# Altium PCB Sitara_Project_Rev_A_PCB.PcbDoc (part 5 of 9)
Units mm, origin at the board's own origin, x right, y up, seen from the top; angles counter-clockwise.
Board outline 120 x 85 mm, 8 copper layers (L1 (Sig), L2 (GND), L3 (PWR), L4 (Sig), L5 (GND), L6 (Sig), L7 (GND), L8 (Sig)), stack 1.188 mm thick; 458 components, 357 nets, 1916 pads, 1164 vias.
Unrouted connection lines stored in the file: 516.
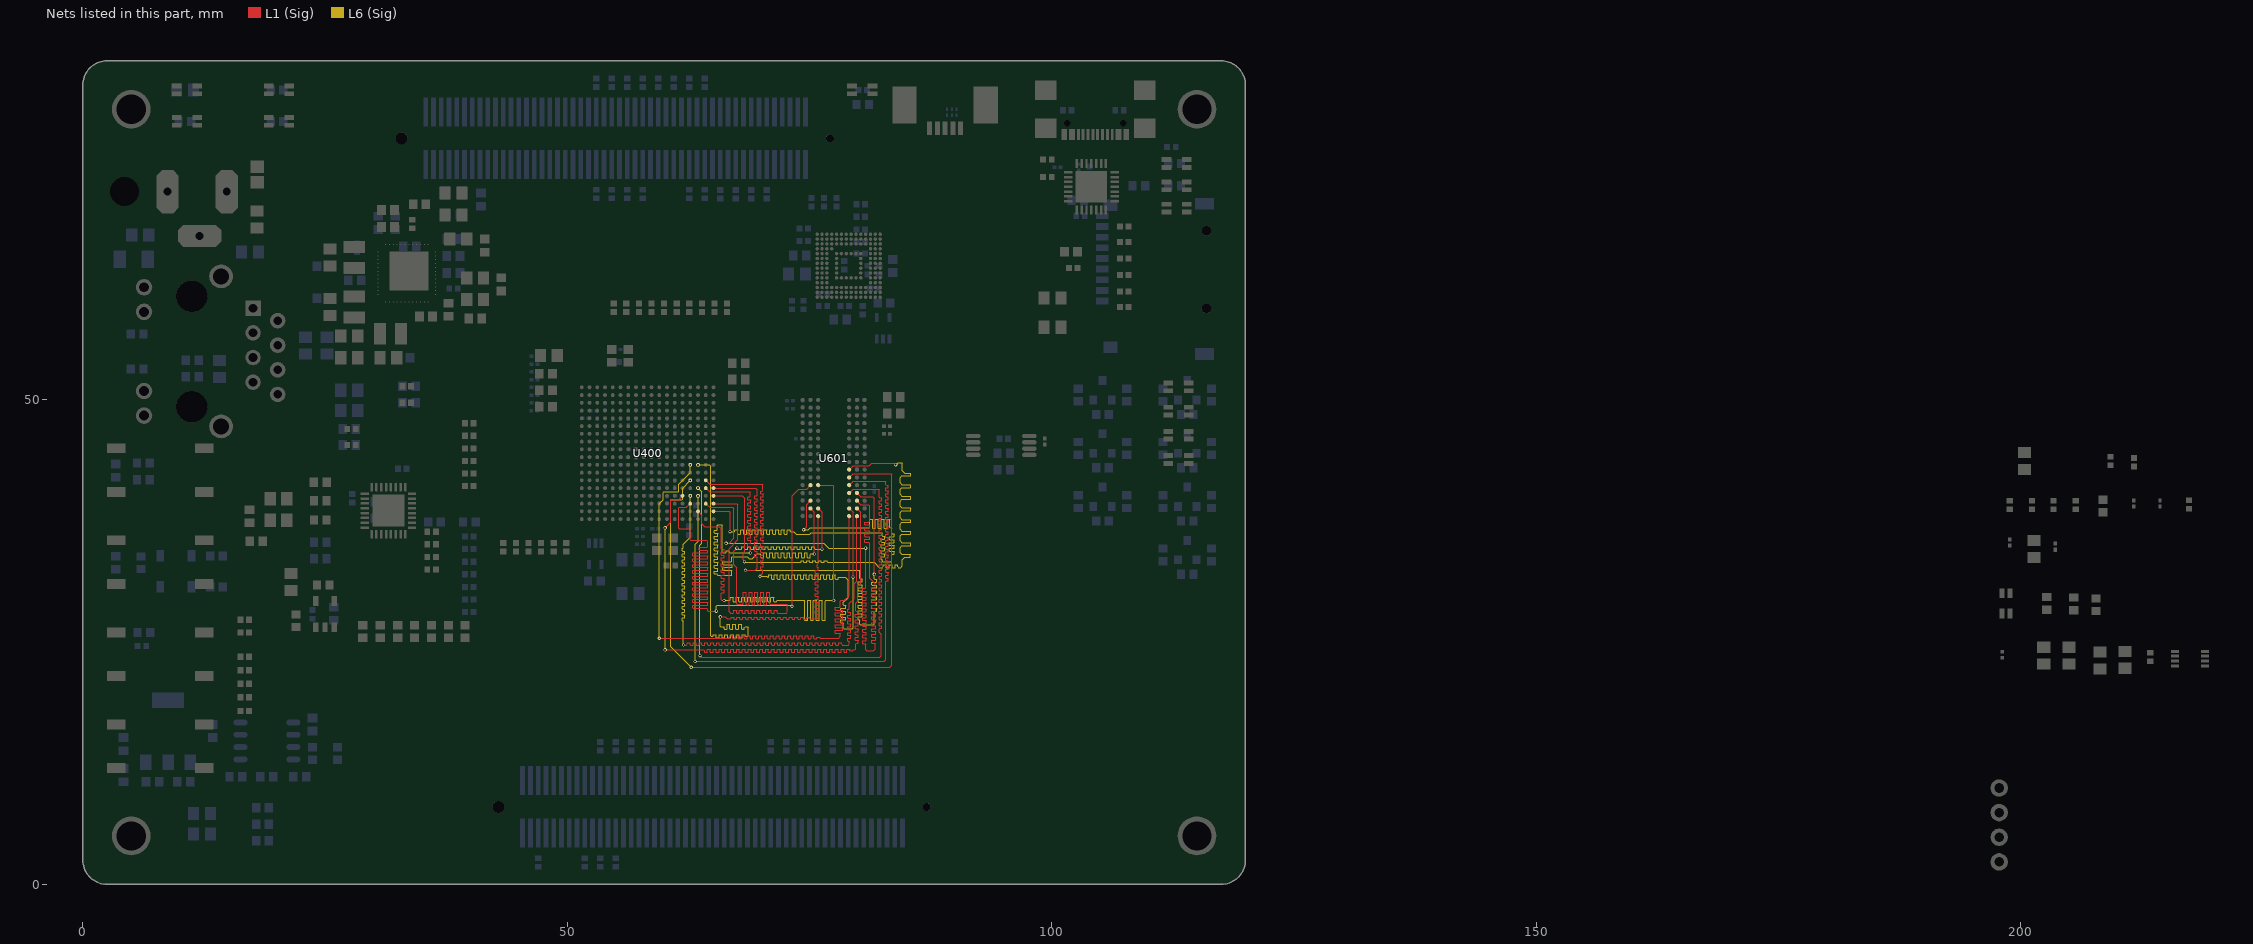
[diagram p8: the nets of this part, all layers, seen from the top]

## Via types
v1: diameter 0.35, hole 0.2, L1 (Sig) to L8 (Sig), tented both sides, 846 vias
v2: diameter 0.45, hole 0.3, L1 (Sig) to L8 (Sig), tented both sides, 302 vias
v3: diameter 0.45/0.45/0.45/0.45/0.45/0.45/0.45/0.45 (per signal layer), hole 0.3, L1 (Sig) to L8 (Sig), tented both sides, 16 vias

## Nets (pads, with @x,y where several pads share a name; then routed paths per layer and width w, separated by ;. In a path a pad name is that pad's centre, name@x,y a point inside that pad or via, vN(x,y) a via of type N, cw(c..) or ccw(c..) an arc to the next point about the centre after c; other vN are vias at no path point) (continued)
DDR_A4: U400.C2 U601.P8 | length 68.1
  L1 (Sig) w0.1: U400.C2@64.3,39.3 64.7,38.9 67.1,38.9 67.2,38.8 67.2,35.7 66.7,35.2 v1(66.4,35.2) ; U601.P8@79.9,39.6 80.3,39.2 81.141,39.2 81.2,39.141 81.2,37.803 81.2,37.453 81.141,37.395 80.719,37.395 80.689,37.365 80.689,37.125 80.719,37.095 81.177,37.095 81.207,37.065 81.207,36.825 81.177,36.795 80.719,36.795 80.689,36.765 80.689,36.525 80.719,36.495 81.177,36.495 81.207,36.465 81.207,36.225 81.177,36.195 80.719,36.195 80.689,36.165 80.689,35.925 80.719,35.895 81.177,35.895 81.207,35.865 81.207,35.625 81.177,35.595 80.719,35.595 80.689,35.565 80.689,35.325 80.719,35.295 81.141,35.295 81.2,35.236 81.2,34.962 81.2,31.614 81.8,31.014 81.8,30.664 81.741,30.605 81.443,30.605 81.413,30.575 81.413,30.335 81.443,30.305 81.805,30.305 81.835,30.275 81.835,30.035 81.805,30.005 81.443,30.005 81.413,29.975 81.413,29.735 81.443,29.705 81.805,29.705 81.835,29.675 81.835,29.435 81.805,29.405 81.443,29.405 81.413,29.375 81.413,29.135 81.443,29.105 81.805,29.105 81.835,29.075 81.835,28.835 81.805,28.805 81.443,28.805 81.413,28.775 81.413,28.535 81.443,28.505 81.805,28.505 81.835,28.475 81.835,28.235 81.805,28.205 81.443,28.205 81.413,28.175 81.413,27.935 81.443,27.905 81.805,27.905 81.835,27.875 81.835,27.635 81.805,27.605 81.443,27.605 81.413,27.575 81.413,27.335 81.443,27.305 81.805,27.305 81.835,27.275 81.835,27.035 81.805,27.005 81.443,27.005 81.413,26.975 81.413,26.735 81.443,26.705 81.805,26.705 81.835,26.675 81.835,26.435 81.805,26.405 81.443,26.405 81.413,26.375 81.413,26.135 81.443,26.105 81.805,26.105 81.835,26.075 81.835,25.835 81.805,25.805 81.443,25.805 81.413,25.775 81.413,25.535 81.443,25.505 81.805,25.505 81.835,25.475 81.835,25.235 81.805,25.205 81.443,25.205 81.413,25.175 81.413,24.935 81.443,24.905 81.741,24.905 81.8,24.847 81.8,24.471 81.8,24.286 81.786,24.286 81.6,24.1 80.9,24.1 80.8,24.2 80.8,24.73 80.8,24.78 80.741,24.838 80.521,24.838 80.491,24.868 80.491,25.108 80.521,25.138 80.835,25.138 80.865,25.168 80.865,25.408 80.835,25.438 80.521,25.438 80.491,25.468 80.491,25.708 80.521,25.738 80.835,25.738 80.865,25.768 80.865,26.008 80.835,26.038 80.521,26.038 80.491,26.068 80.491,26.308 80.521,26.338 80.835,26.338 80.865,26.368 80.865,26.608 80.835,26.638 80.521,26.638 80.491,26.668 80.491,26.908 80.521,26.938 80.835,26.938 80.865,26.968 80.865,27.208 80.835,27.238 80.521,27.238 80.491,27.268 80.491,27.508 80.521,27.538 80.835,27.538 80.865,27.568 80.865,27.808 80.835,27.838 80.521,27.838 80.491,27.868 80.491,28.108 80.521,28.138 80.835,28.138 80.865,28.168 80.865,28.408 80.835,28.438 80.521,28.438 80.491,28.468 80.491,28.708 80.521,28.738 80.835,28.738 80.865,28.768 80.865,29.008 80.835,29.038 80.521,29.038 80.491,29.068 80.491,29.308 80.521,29.338 80.835,29.338 80.865,29.368 80.865,29.608 80.835,29.638 80.521,29.638 80.491,29.668 80.491,29.908 80.521,29.938 80.835,29.938 80.865,29.968 80.865,30.208 80.835,30.238 80.521,30.238 80.491,30.268 80.491,30.508 80.521,30.538 80.741,30.538 80.8,30.597 80.8,30.9 v1(80.8,34.7)
  L6 (Sig) w0.1: v1(66.4,35.2) 76.5,35.2 77,34.7 v1(80.8,34.7)
DDR_A5: U400.B1 U601.P2 | length 59.4
  L1 (Sig) w0.1: U400.B1@65.1,38.5 66.7,38.5 66.8,38.4 v1(66.8,36.4) ; v1(74.4,36.6) 74.7,36.9 74.7,39.2 U601.P2@75.1,39.6
  L6 (Sig) w0.1: v1(66.8,36.4) 67.2,36.4 67.25,36.4 67.309,36.459 67.309,36.556 67.339,36.586 67.579,36.586 67.609,36.556 67.609,36.18 67.639,36.15 67.879,36.15 67.909,36.18 67.909,36.556 67.939,36.586 68.179,36.586 68.209,36.556 68.209,36.18 68.239,36.15 68.479,36.15 68.509,36.18 68.509,36.556 68.539,36.586 68.779,36.586 68.809,36.556 68.809,36.18 68.839,36.15 69.079,36.15 69.109,36.18 69.109,36.556 69.139,36.586 69.379,36.586 69.409,36.556 69.409,36.18 69.439,36.15 69.679,36.15 69.709,36.18 69.709,36.556 69.739,36.586 69.979,36.586 70.009,36.556 70.009,36.18 70.039,36.15 70.279,36.15 70.309,36.18 70.309,36.556 70.339,36.586 70.579,36.586 70.609,36.556 70.609,36.18 70.639,36.15 70.879,36.15 70.909,36.18 70.909,36.556 70.939,36.586 71.179,36.586 71.209,36.556 71.209,36.18 71.239,36.15 71.479,36.15 71.509,36.18 71.509,36.556 71.539,36.586 71.779,36.586 71.809,36.556 71.809,36.18 71.839,36.15 72.079,36.15 72.109,36.18 72.109,36.556 72.139,36.586 72.379,36.586 72.409,36.556 72.409,36.18 72.439,36.15 72.679,36.15 72.709,36.18 72.709,36.556 72.739,36.586 72.979,36.586 73.009,36.556 73.009,36.459 73.067,36.4 73.389,36.4 73.642,36.147 75.047,36.147 75.2,36.3 82.441,36.3 82.5,36.241 82.5,36.077 82.5,35.99 82.559,35.931 82.72,35.931 82.75,35.901 82.75,35.661 82.72,35.631 82.439,35.631 82.409,35.601 82.409,35.361 82.439,35.331 82.72,35.331 82.75,35.301 82.75,35.061 82.72,35.031 82.439,35.031 82.409,35.001 82.409,34.761 82.439,34.731 82.72,34.731 82.75,34.701 82.75,34.461 82.72,34.431 82.439,34.431 82.409,34.401 82.409,34.161 82.439,34.131 82.72,34.131 82.75,34.101 82.75,33.861 82.72,33.831 82.439,33.831 82.409,33.801 82.409,33.561 82.439,33.531 82.441,33.531 82.5,33.472 82.5,33.422 82.5,33.359 82.559,33.3 83.4,33.3 83.5,33.4 83.5,33.7 83.5,34.02 83.559,34.079 83.72,34.079 83.75,34.109 83.75,34.349 83.72,34.379 83.28,34.379 83.25,34.409 83.25,34.649 83.28,34.679 83.72,34.679 83.75,34.709 83.75,34.949 83.72,34.979 83.28,34.979 83.25,35.009 83.25,35.249 83.28,35.279 83.72,35.279 83.75,35.309 83.75,35.549 83.72,35.579 83.28,35.579 83.25,35.609 83.25,35.849 83.28,35.879 83.72,35.879 83.75,35.909 83.75,36.149 83.72,36.179 83.559,36.179 83.5,36.238 83.5,36.288 83.5,36.741 83.441,36.8 83.37,36.8 83.311,36.859 83.311,37.63 83.281,37.66 83.041,37.66 83.011,37.63 83.011,36.77 82.981,36.74 82.741,36.74 82.711,36.77 82.711,37.63 82.681,37.66 82.441,37.66 82.411,37.63 82.411,36.77 82.381,36.74 82.141,36.74 82.111,36.77 82.111,37.63 82.081,37.66 81.841,37.66 81.811,37.63 81.811,36.77 81.781,36.74 81.541,36.74 81.511,36.77 81.511,37.63 81.481,37.66 81.241,37.66 81.211,37.63 81.211,36.859 81.152,36.8 81.102,36.8 75.1,36.8 74.9,36.6 v1(74.4,36.6)
DDR_A6: U400.D5 U601.R8 | length 68.8
  L1 (Sig) w0.1: v1(60.1,24.2) 63.765,24.2 64.115,24.2 64.173,24.141 64.173,23.98 64.203,23.95 64.443,23.95 64.473,23.98 64.473,24.235 64.503,24.265 64.743,24.265 64.773,24.235 64.773,23.98 64.803,23.95 65.043,23.95 65.073,23.98 65.073,24.235 65.103,24.265 65.343,24.265 65.373,24.235 65.373,23.98 65.403,23.95 65.643,23.95 65.673,23.98 65.673,24.235 65.703,24.265 65.943,24.265 65.973,24.235 65.973,23.98 66.003,23.95 66.243,23.95 66.273,23.98 66.273,24.235 66.303,24.265 66.543,24.265 66.573,24.235 66.573,23.98 66.603,23.95 66.843,23.95 66.873,23.98 66.873,24.235 66.903,24.265 67.143,24.265 67.173,24.235 67.173,23.98 67.203,23.95 67.443,23.95 67.473,23.98 67.473,24.235 67.503,24.265 67.743,24.265 67.773,24.235 67.773,23.98 67.803,23.95 68.043,23.95 68.073,23.98 68.073,24.235 68.103,24.265 68.343,24.265 68.373,24.235 68.373,23.98 68.403,23.95 68.643,23.95 68.673,23.98 68.673,24.235 68.703,24.265 68.943,24.265 68.973,24.235 68.973,23.98 69.003,23.95 69.243,23.95 69.273,23.98 69.273,24.235 69.303,24.265 69.543,24.265 69.573,24.235 69.573,23.98 69.603,23.95 69.843,23.95 69.873,23.98 69.873,24.235 69.903,24.265 70.143,24.265 70.173,24.235 70.173,23.98 70.203,23.95 70.443,23.95 70.473,23.98 70.473,24.235 70.503,24.265 70.743,24.265 70.773,24.235 70.773,23.98 70.803,23.95 71.043,23.95 71.073,23.98 71.073,24.235 71.103,24.265 71.343,24.265 71.373,24.235 71.373,23.98 71.403,23.95 71.643,23.95 71.673,23.98 71.673,24.235 71.703,24.265 71.943,24.265 71.973,24.235 71.973,23.98 72.003,23.95 72.243,23.95 72.273,23.98 72.273,24.235 72.303,24.265 72.543,24.265 72.573,24.235 72.573,23.98 72.603,23.95 72.843,23.95 72.873,23.98 72.873,24.235 72.903,24.265 73.143,24.265 73.173,24.235 73.173,23.98 73.203,23.95 73.443,23.95 73.473,23.98 73.473,24.235 73.503,24.265 73.743,24.265 73.773,24.235 73.773,23.98 73.803,23.95 74.043,23.95 74.073,23.98 74.073,24.235 74.103,24.265 74.343,24.265 74.373,24.235 74.373,23.98 74.403,23.95 74.643,23.95 74.673,23.98 74.673,24.235 74.703,24.265 74.943,24.265 74.973,24.235 74.973,23.98 75.003,23.95 75.243,23.95 75.273,23.98 75.273,24.235 75.303,24.265 75.543,24.265 75.573,24.235 75.573,23.98 75.603,23.95 75.843,23.95 75.873,23.98 75.873,24.235 75.903,24.265 76.143,24.265 76.173,24.235 76.173,23.98 76.203,23.95 76.443,23.95 76.473,23.98 76.473,24.235 76.503,24.265 76.743,24.265 76.773,24.235 76.773,23.98 76.803,23.95 77.043,23.95 77.073,23.98 77.073,24.235 77.103,24.265 77.343,24.265 77.373,24.235 77.373,23.98 77.403,23.95 77.643,23.95 77.673,23.98 77.673,24.235 77.703,24.265 77.943,24.265 77.973,24.235 77.973,23.98 78.003,23.95 78.243,23.95 78.273,23.98 78.273,24.235 78.303,24.265 78.543,24.265 78.573,24.235 78.573,23.98 78.603,23.95 78.843,23.95 78.873,23.98 78.873,24.235 78.903,24.265 79.143,24.265 79.173,24.235 79.173,24.132 79.203,24.102 79.443,24.102 79.473,24.132 79.473,24.141 79.532,24.2 79.7,24.2 79.754,24.254 79.8,24.3 79.8,24.475 79.8,24.825 79.859,24.884 80.02,24.884 80.05,24.914 80.05,25.154 80.02,25.184 79.777,25.184 79.747,25.214 79.747,25.454 79.777,25.484 80.02,25.484 80.05,25.514 80.05,25.754 80.02,25.784 79.777,25.784 79.747,25.814 79.747,26.054 79.777,26.084 80.02,26.084 80.05,26.114 80.05,26.354 80.02,26.384 79.777,26.384 79.747,26.414 79.747,26.654 79.777,26.684 80.02,26.684 80.05,26.714 80.05,26.954 80.02,26.984 79.777,26.984 79.747,27.014 79.747,27.254 79.777,27.284 80.02,27.284 80.05,27.314 80.05,27.554 80.02,27.584 79.777,27.584 79.747,27.614 79.747,27.854 79.777,27.884 80.02,27.884 80.05,27.914 80.05,28.154 80.02,28.184 79.859,28.184 79.8,28.242 79.8,28.88 79.8,29 80,29.2 80,30.8 80.3,31.1 80.3,38.4 U601.R8@79.9,38.8 ; v1(60.1,36.8) 60.112,36.8 60.7,37.388 60.7,39.641 60.759,39.7 61.5,39.7 U400.D5@61.9,40.1
  L6 (Sig) w0.1: v1(60.1,24.2) v1(60.1,36.8)
DDR_A7: U400.E2 U601.R2 | length 62
  L1 (Sig) w0.1: U400.E2@64.3,40.9 64.7,40.5 68.841,40.5 68.9,40.441 68.9,40.398 68.9,40.048 68.841,39.989 68.68,39.989 68.65,39.959 68.65,39.719 68.68,39.689 68.935,39.689 68.965,39.659 68.965,39.419 68.935,39.389 68.68,39.389 68.65,39.359 68.65,39.119 68.68,39.089 68.935,39.089 68.965,39.059 68.965,38.819 68.935,38.789 68.68,38.789 68.65,38.759 68.65,38.519 68.68,38.489 68.935,38.489 68.965,38.459 68.965,38.219 68.935,38.189 68.68,38.189 68.65,38.159 68.65,37.919 68.68,37.889 68.935,37.889 68.965,37.859 68.965,37.619 68.935,37.589 68.68,37.589 68.65,37.559 68.65,37.319 68.68,37.289 68.935,37.289 68.965,37.259 68.965,37.019 68.935,36.989 68.68,36.989 68.65,36.959 68.65,36.719 68.68,36.689 68.935,36.689 68.965,36.659 68.965,36.419 68.935,36.389 68.68,36.389 68.65,36.359 68.65,36.119 68.68,36.089 68.935,36.089 68.965,36.059 68.965,35.819 68.935,35.789 68.68,35.789 68.65,35.759 68.65,35.519 68.68,35.489 68.935,35.489 68.965,35.459 68.965,35.219 68.935,35.189 68.68,35.189 68.65,35.159 68.65,34.919 68.68,34.889 68.841,34.889 68.9,34.831 68.9,34.4 v1(68.9,34.2) ; U601.R2@75.1,38.8 75.5,38.4 v1(75.5,34.1)
  L6 (Sig) w0.1: v1(68.9,34.2) 67,34.2 66.793,34.2 66.734,34.259 66.734,34.435 66.719,34.45 66.449,34.45 66.434,34.435 66.434,34.259 66.376,34.2 66.326,34.2 66.059,34.2 66,34.259 66,37.041 65.941,37.1 65.559,37.1 65.513,37.054 65.5,37.041 65.5,36.593 65.441,36.535 65.223,36.535 65.193,36.505 65.193,36.265 65.223,36.235 65.529,36.235 65.559,36.205 65.559,35.965 65.529,35.935 65.223,35.935 65.193,35.905 65.193,35.665 65.223,35.635 65.529,35.635 65.559,35.605 65.559,35.365 65.529,35.335 65.223,35.335 65.193,35.305 65.193,35.065 65.223,35.035 65.529,35.035 65.559,35.005 65.559,34.765 65.529,34.735 65.223,34.735 65.193,34.705 65.193,34.465 65.223,34.435 65.529,34.435 65.559,34.405 65.559,34.165 65.529,34.135 65.223,34.135 65.193,34.105 65.193,33.865 65.223,33.835 65.529,33.835 65.559,33.805 65.559,33.565 65.529,33.535 65.223,33.535 65.193,33.505 65.193,33.265 65.223,33.235 65.529,33.235 65.559,33.205 65.559,32.965 65.529,32.935 65.223,32.935 65.193,32.905 65.193,32.665 65.223,32.635 65.529,32.635 65.559,32.605 65.559,32.365 65.529,32.335 65.223,32.335 65.193,32.305 65.193,32.065 65.223,32.035 65.441,32.035 65.5,31.976 65.5,31.959 65.532,31.926 65.559,31.9 66.941,31.9 66.959,31.918 67,31.959 67,32.344 66.941,32.403 66.093,32.403 66.063,32.433 66.063,32.673 66.093,32.703 67.028,32.703 67.058,32.733 67.058,32.973 67.028,33.003 66.093,33.003 66.063,33.033 66.063,33.273 66.093,33.303 66.941,33.303 67,33.361 67,33.741 67.053,33.794 67.059,33.8 68.6,33.8 68.8,33.6 69.1,33.6 69.6,34.1 69.7,34.1 69.933,34.1 69.991,34.041 69.991,33.747 70.021,33.717 70.261,33.717 70.291,33.747 70.291,34.212 70.321,34.242 70.561,34.242 70.591,34.212 70.591,33.747 70.621,33.717 70.861,33.717 70.891,33.747 70.891,34.212 70.921,34.242 71.161,34.242 71.191,34.212 71.191,33.747 71.221,33.717 71.461,33.717 71.491,33.747 71.491,34.212 71.521,34.242 71.761,34.242 71.791,34.212 71.791,33.747 71.821,33.717 72.061,33.717 72.091,33.747 72.091,34.212 72.121,34.242 72.361,34.242 72.391,34.212 72.391,33.747 72.421,33.717 72.661,33.717 72.691,33.747 72.691,34.212 72.721,34.242 72.961,34.242 72.991,34.212 72.991,33.747 73.021,33.717 73.261,33.717 73.291,33.747 73.291,34.212 73.321,34.242 73.561,34.242 73.591,34.212 73.591,33.747 73.621,33.717 73.861,33.717 73.891,33.747 73.891,34.212 73.921,34.242 74.161,34.242 74.191,34.212 74.191,33.747 74.221,33.717 74.461,33.717 74.491,33.747 74.491,34.212 74.521,34.242 74.761,34.242 74.791,34.212 74.791,33.747 74.821,33.717 75.061,33.717 75.091,33.747 75.091,34.041 75.15,34.1 75.2,34.1 v1(75.5,34.1)
DDR_A8: U400.D4 U601.T8 | length 66.8
  L1 (Sig) w0.1: v1(62,24.7) 62.3,24.7 62.35,24.7 62.409,24.759 62.409,24.92 62.439,24.95 62.679,24.95 62.709,24.92 62.709,24.723 62.739,24.693 62.979,24.693 63.009,24.723 63.009,24.92 63.039,24.95 63.279,24.95 63.309,24.92 63.309,24.723 63.339,24.693 63.579,24.693 63.609,24.723 63.609,24.92 63.639,24.95 63.879,24.95 63.909,24.92 63.909,24.723 63.939,24.693 64.179,24.693 64.209,24.723 64.209,24.92 64.239,24.95 64.479,24.95 64.509,24.92 64.509,24.723 64.539,24.693 64.779,24.693 64.809,24.723 64.809,24.92 64.839,24.95 65.079,24.95 65.109,24.92 65.109,24.723 65.139,24.693 65.379,24.693 65.409,24.723 65.409,24.92 65.439,24.95 65.679,24.95 65.709,24.92 65.709,24.723 65.739,24.693 65.979,24.693 66.009,24.723 66.009,24.92 66.039,24.95 66.279,24.95 66.309,24.92 66.309,24.723 66.339,24.693 66.579,24.693 66.609,24.723 66.609,24.92 66.639,24.95 66.879,24.95 66.909,24.92 66.909,24.723 66.939,24.693 67.179,24.693 67.209,24.723 67.209,24.92 67.239,24.95 67.479,24.95 67.509,24.92 67.509,24.723 67.539,24.693 67.779,24.693 67.809,24.723 67.809,24.92 67.839,24.95 68.079,24.95 68.109,24.92 68.109,24.723 68.139,24.693 68.379,24.693 68.409,24.723 68.409,24.92 68.439,24.95 68.679,24.95 68.709,24.92 68.709,24.723 68.739,24.693 68.979,24.693 69.009,24.723 69.009,24.92 69.039,24.95 69.279,24.95 69.309,24.92 69.309,24.723 69.339,24.693 69.579,24.693 69.609,24.723 69.609,24.92 69.639,24.95 69.879,24.95 69.909,24.92 69.909,24.723 69.939,24.693 70.179,24.693 70.209,24.723 70.209,24.92 70.239,24.95 70.479,24.95 70.509,24.92 70.509,24.723 70.539,24.693 70.779,24.693 70.809,24.723 70.809,24.92 70.839,24.95 71.079,24.95 71.109,24.92 71.109,24.723 71.139,24.693 71.379,24.693 71.409,24.723 71.409,24.92 71.439,24.95 71.679,24.95 71.709,24.92 71.709,24.723 71.739,24.693 71.979,24.693 72.009,24.723 72.009,24.92 72.039,24.95 72.279,24.95 72.309,24.92 72.309,24.723 72.339,24.693 72.579,24.693 72.609,24.723 72.609,24.92 72.639,24.95 72.879,24.95 72.909,24.92 72.909,24.723 72.939,24.693 73.179,24.693 73.209,24.723 73.209,24.92 73.239,24.95 73.479,24.95 73.509,24.92 73.509,24.723 73.539,24.693 73.779,24.693 73.809,24.723 73.809,24.92 73.839,24.95 74.079,24.95 74.109,24.92 74.109,24.723 74.139,24.693 74.379,24.693 74.409,24.723 74.409,24.92 74.439,24.95 74.679,24.95 74.709,24.92 74.709,24.723 74.739,24.693 74.979,24.693 75.009,24.723 75.009,24.92 75.039,24.95 75.279,24.95 75.309,24.92 75.309,24.723 75.339,24.693 75.579,24.693 75.609,24.723 75.609,24.92 75.639,24.95 75.879,24.95 75.909,24.92 75.909,24.723 75.939,24.693 76.179,24.693 76.209,24.723 76.209,24.92 76.239,24.95 76.479,24.95 76.509,24.92 76.509,24.723 76.539,24.693 76.779,24.693 76.809,24.723 76.809,24.92 76.839,24.95 77.079,24.95 77.109,24.92 77.109,24.723 77.139,24.693 77.379,24.693 77.409,24.723 77.409,24.92 77.439,24.95 77.679,24.95 77.709,24.92 77.709,24.723 77.739,24.693 77.979,24.693 78.009,24.723 78.009,24.92 78.039,24.95 78.279,24.95 78.309,24.92 78.309,24.759 78.367,24.7 78.818,24.7 78.868,24.7 79.041,24.7 79.1,24.759 79.1,24.979 79.1,25.029 79.041,25.088 78.979,25.088 78.949,25.118 78.949,25.358 78.979,25.388 79.225,25.388 79.255,25.418 79.255,25.658 79.225,25.688 78.979,25.688 78.949,25.718 78.949,25.958 78.979,25.988 79.225,25.988 79.255,26.018 79.255,26.258 79.225,26.288 78.979,26.288 78.949,26.318 78.949,26.558 78.979,26.588 79.225,26.588 79.255,26.618 79.255,26.858 79.225,26.888 78.979,26.888 78.949,26.918 78.949,27.158 78.979,27.188 79.225,27.188 79.255,27.218 79.255,27.458 79.225,27.488 78.979,27.488 78.949,27.518 78.949,27.758 78.979,27.788 79.225,27.788 79.255,27.818 79.255,28.058 79.225,28.088 78.979,28.088 78.949,28.118 78.949,28.358 78.979,28.388 79.041,28.388 79.1,28.446 79.1,28.775 79.1,29 79.6,29.5 79.6,31 79.9,31.3 U601.T8@79.9,38
  L6 (Sig) w0.1: v1(62,24.7) 62,27.091 62,27.141 61.941,27.2 61.899,27.2 61.869,27.23 61.869,27.47 61.899,27.5 62.101,27.5 62.131,27.53 62.131,27.77 62.101,27.8 61.899,27.8 61.869,27.83 61.869,28.07 61.899,28.1 62.101,28.1 62.131,28.13 62.131,28.37 62.101,28.4 61.899,28.4 61.869,28.43 61.869,28.67 61.899,28.7 62.101,28.7 62.131,28.73 62.131,28.97 62.101,29 61.899,29 61.869,29.03 61.869,29.27 61.899,29.3 62.101,29.3 62.131,29.33 62.131,29.57 62.101,29.6 61.899,29.6 61.869,29.63 61.869,29.87 61.899,29.9 62.101,29.9 62.131,29.93 62.131,30.17 62.101,30.2 61.899,30.2 61.869,30.23 61.869,30.47 61.899,30.5 62.101,30.5 62.131,30.53 62.131,30.77 62.101,30.8 61.899,30.8 61.869,30.83 61.869,31.07 61.899,31.1 62.101,31.1 62.131,31.13 62.131,31.37 62.101,31.4 61.899,31.4 61.869,31.43 61.869,31.67 61.899,31.7 62.101,31.7 62.131,31.73 62.131,31.97 62.101,32 61.899,32 61.869,32.03 61.869,32.27 61.899,32.3 62.101,32.3 62.131,32.33 62.131,32.57 62.101,32.6 61.899,32.6 61.869,32.63 61.869,32.87 61.899,32.9 62.101,32.9 62.131,32.93 62.131,33.17 62.101,33.2 61.899,33.2 61.869,33.23 61.869,33.47 61.899,33.5 62.101,33.5 62.131,33.53 62.131,33.77 62.101,33.8 61.899,33.8 61.869,33.83 61.869,34.07 61.899,34.1 62.101,34.1 62.131,34.13 62.131,34.37 62.101,34.4 61.899,34.4 61.869,34.43 61.869,34.67 61.899,34.7 61.941,34.7 62,34.759 62,34.92 62,35.1 62.7,35.8 v1(62.7,40.1)
DDR_A9: U400.C1 U601.R3 | length 68
  L1 (Sig) w0.1: U400.C1@65.1,39.3 67.5,39.3 67.6,39.2 67.6,35.554 66.7,34.654 66.7,28.159 66.859,28 67.012,28 67.12,28 67.179,28.059 67.179,28.258 67.209,28.288 67.449,28.288 67.479,28.258 67.479,28.03 67.509,28 67.749,28 67.779,28.03 67.779,28.258 67.809,28.288 68.049,28.288 68.079,28.258 68.079,28.03 68.109,28 68.349,28 68.379,28.03 68.379,28.258 68.409,28.288 68.649,28.288 68.679,28.258 68.679,28.03 68.709,28 68.949,28 68.979,28.03 68.979,28.258 69.009,28.288 69.249,28.288 69.279,28.258 69.279,28.03 69.309,28 69.549,28 69.579,28.03 69.579,28.258 69.609,28.288 69.849,28.288 69.879,28.258 69.879,28.03 69.909,28 70.149,28 70.179,28.03 70.179,28.258 70.209,28.288 70.449,28.288 70.479,28.258 70.479,28.03 70.509,28 70.749,28 70.779,28.03 70.779,28.258 70.809,28.288 71.049,28.288 71.079,28.258 71.079,28.03 71.109,28 71.349,28 71.379,28.03 71.379,28.258 71.409,28.288 71.649,28.288 71.679,28.258 71.679,28.059 71.737,28 72.087,28 72.641,28 72.7,28.059 72.7,28.841 72.641,28.9 71.286,28.9 70.936,28.9 70.878,28.959 70.878,30.13 70.848,30.16 70.608,30.16 70.578,30.13 70.578,28.91 70.548,28.88 70.308,28.88 70.278,28.91 70.278,30.13 70.248,30.16 70.008,30.16 69.978,30.13 69.978,28.91 69.948,28.88 69.708,28.88 69.678,28.91 69.678,30.13 69.648,30.16 69.408,30.16 69.378,30.13 69.378,28.91 69.348,28.88 69.108,28.88 69.078,28.91 69.078,30.13 69.048,30.16 68.808,30.16 68.778,30.13 68.778,28.91 68.748,28.88 68.508,28.88 68.478,28.91 68.478,30.13 68.448,30.16 68.208,30.16 68.178,30.13 68.178,28.959 68.119,28.9 67.736,28.9 67.559,28.9 67.5,28.959 67.5,32.7 67.2,33 67.2,34.4 v1(67.5,34.7) ; U601.R3@75.9,38.8 76.3,38.4 v1(76.3,34.6)
  L6 (Sig) w0.1: v1(67.5,34.7) 67.568,34.7 67.668,34.6 67.925,34.6 67.975,34.6 68.034,34.659 68.034,34.82 68.064,34.85 68.304,34.85 68.334,34.82 68.334,34.596 68.364,34.566 68.604,34.566 68.634,34.596 68.634,34.82 68.664,34.85 68.904,34.85 68.934,34.82 68.934,34.596 68.964,34.566 69.204,34.566 69.234,34.596 69.234,34.82 69.264,34.85 69.504,34.85 69.534,34.82 69.534,34.596 69.564,34.566 69.804,34.566 69.834,34.596 69.834,34.82 69.864,34.85 70.104,34.85 70.134,34.82 70.134,34.596 70.164,34.566 70.404,34.566 70.434,34.596 70.434,34.82 70.464,34.85 70.704,34.85 70.734,34.82 70.734,34.596 70.764,34.566 71.004,34.566 71.034,34.596 71.034,34.82 71.064,34.85 71.304,34.85 71.334,34.82 71.334,34.596 71.364,34.566 71.604,34.566 71.634,34.596 71.634,34.82 71.664,34.85 71.904,34.85 71.934,34.82 71.934,34.596 71.964,34.566 72.204,34.566 72.234,34.596 72.234,34.82 72.264,34.85 72.504,34.85 72.534,34.82 72.534,34.596 72.564,34.566 72.804,34.566 72.834,34.596 72.834,34.82 72.864,34.85 73.104,34.85 73.134,34.82 73.134,34.596 73.164,34.566 73.404,34.566 73.434,34.596 73.434,34.82 73.464,34.85 73.704,34.85 73.734,34.82 73.734,34.596 73.764,34.566 74.004,34.566 74.034,34.596 74.034,34.82 74.064,34.85 74.304,34.85 74.334,34.82 74.334,34.596 74.364,34.566 74.604,34.566 74.634,34.596 74.634,34.82 74.664,34.85 74.904,34.85 74.934,34.82 74.934,34.596 74.964,34.566 75.204,34.566 75.234,34.596 75.234,34.82 75.264,34.85 75.504,34.85 75.534,34.82 75.534,34.659 75.592,34.6 76.07,34.6 v1(76.3,34.6)
DDR_A10: U400.F4 U601.L7 | length 66.7
  L1 (Sig) w0.1: v1(62.8,22.4) 83.3,22.4 83.5,22.6 83.5,42.341 83.441,42.4 79.5,42.4 U601.L7@79.1,42
  L6 (Sig) w0.1: v1(62.7,41.7) 61.9,40.9 61.9,39.759 61.841,39.7 60.759,39.7 60.7,39.641 60.7,24.5 v1(62.8,22.4)
DDR_A11: U400.F2 U601.R7 | length 63.6
  L1 (Sig) w0.1: U400.F2@64.3,41.7 64.7,41.3 70.141,41.3 70.2,41.241 70.2,41 70.2,40.65 70.141,40.591 69.98,40.591 69.95,40.561 69.95,40.321 69.98,40.291 70.207,40.291 70.237,40.261 70.237,40.021 70.207,39.991 69.98,39.991 69.95,39.961 69.95,39.721 69.98,39.691 70.207,39.691 70.237,39.661 70.237,39.421 70.207,39.391 69.98,39.391 69.95,39.361 69.95,39.121 69.98,39.091 70.207,39.091 70.237,39.061 70.237,38.821 70.207,38.791 69.98,38.791 69.95,38.761 69.95,38.521 69.98,38.491 70.207,38.491 70.237,38.461 70.237,38.221 70.207,38.191 69.98,38.191 69.95,38.161 69.95,37.921 69.98,37.891 70.207,37.891 70.237,37.861 70.237,37.621 70.207,37.591 69.98,37.591 69.95,37.561 69.95,37.321 69.98,37.291 70.207,37.291 70.237,37.261 70.237,37.021 70.207,36.991 69.98,36.991 69.95,36.961 69.95,36.721 69.98,36.691 70.207,36.691 70.237,36.661 70.237,36.421 70.207,36.391 69.98,36.391 69.95,36.361 69.95,36.121 69.98,36.091 70.207,36.091 70.237,36.061 70.237,35.821 70.207,35.791 69.98,35.791 69.95,35.761 69.95,35.521 69.98,35.491 70.207,35.491 70.237,35.461 70.237,35.221 70.207,35.191 69.98,35.191 69.95,35.161 69.95,34.921 69.98,34.891 70.207,34.891 70.237,34.861 70.237,34.621 70.207,34.591 69.98,34.591 69.95,34.561 69.95,34.321 69.98,34.291 70.207,34.291 70.237,34.261 70.237,34.021 70.207,33.991 69.98,33.991 69.95,33.961 69.95,33.721 69.98,33.691 70.207,33.691 70.237,33.661 70.237,33.421 70.207,33.391 69.98,33.391 69.95,33.361 69.95,33.121 69.98,33.091 70.207,33.091 70.237,33.061 70.237,32.821 70.207,32.791 69.98,32.791 69.95,32.761 69.95,32.521 69.98,32.491 70.141,32.491 70.2,32.433 70.2,32.133 69.9,31.833 v1(69.9,31.8) ; U601.R7@79.1,38.8 79.5,38.4 v1(79.5,31.7)
  L6 (Sig) w0.1: v1(69.9,31.8) 70.579,31.8 70.679,31.7 70.729,31.7 70.788,31.759 70.788,31.92 70.818,31.95 71.058,31.95 71.088,31.92 71.088,31.515 71.118,31.485 71.358,31.485 71.388,31.515 71.388,31.92 71.418,31.95 71.658,31.95 71.688,31.92 71.688,31.515 71.718,31.485 71.958,31.485 71.988,31.515 71.988,31.92 72.018,31.95 72.258,31.95 72.288,31.92 72.288,31.515 72.318,31.485 72.558,31.485 72.588,31.515 72.588,31.92 72.618,31.95 72.858,31.95 72.888,31.92 72.888,31.515 72.918,31.485 73.158,31.485 73.188,31.515 73.188,31.92 73.218,31.95 73.458,31.95 73.488,31.92 73.488,31.515 73.518,31.485 73.758,31.485 73.788,31.515 73.788,31.92 73.818,31.95 74.058,31.95 74.088,31.92 74.088,31.515 74.118,31.485 74.358,31.485 74.388,31.515 74.388,31.92 74.418,31.95 74.658,31.95 74.688,31.92 74.688,31.515 74.718,31.485 74.958,31.485 74.988,31.515 74.988,31.92 75.018,31.95 75.258,31.95 75.288,31.92 75.288,31.515 75.318,31.485 75.558,31.485 75.588,31.515 75.588,31.92 75.618,31.95 75.858,31.95 75.888,31.92 75.888,31.515 75.918,31.485 76.158,31.485 76.188,31.515 76.188,31.92 76.218,31.95 76.458,31.95 76.488,31.92 76.488,31.515 76.518,31.485 76.758,31.485 76.788,31.515 76.788,31.92 76.818,31.95 77.058,31.95 77.088,31.92 77.088,31.515 77.118,31.485 77.358,31.485 77.388,31.515 77.388,31.92 77.418,31.95 77.658,31.95 77.688,31.92 77.688,31.515 77.718,31.485 77.958,31.485 77.988,31.515 77.988,31.641 78.046,31.7 78.391,31.7 78.7,31.7 79,31.4 79,29.6 78.5,29.1 78.5,28.9 78.5,28.85 78.559,28.791 78.72,28.791 78.75,28.761 78.75,28.521 78.72,28.491 78.26,28.491 78.23,28.461 78.23,28.221 78.26,28.191 78.72,28.191 78.75,28.161 78.75,27.921 78.72,27.891 78.26,27.891 78.23,27.861 78.23,27.621 78.26,27.591 78.72,27.591 78.75,27.561 78.75,27.321 78.72,27.291 78.26,27.291 78.23,27.261 78.23,27.021 78.26,26.991 78.441,26.991 78.5,26.933 78.5,26.611 78.5,26.459 78.559,26.4 79.441,26.4 79.5,26.459 v1(79.5,31.7)
DDR_A12: U400.E3 U601.N7 | length 67.5
  L1 (Sig) w0.1: v1(63.7,23.6) 63.745,23.6 63.884,23.462 82.262,23.462 82.4,23.6 82.4,25.799 82.2,25.999 82.2,26.349 82.259,26.407 82.42,26.407 82.45,26.437 82.45,26.677 82.42,26.707 82.212,26.707 82.182,26.737 82.182,26.977 82.212,27.007 82.42,27.007 82.45,27.037 82.45,27.277 82.42,27.307 82.212,27.307 82.182,27.337 82.182,27.577 82.212,27.607 82.42,27.607 82.45,27.637 82.45,27.877 82.42,27.907 82.212,27.907 82.182,27.937 82.182,28.177 82.212,28.207 82.42,28.207 82.45,28.237 82.45,28.477 82.42,28.507 82.212,28.507 82.182,28.537 82.182,28.777 82.212,28.807 82.42,28.807 82.45,28.837 82.45,29.077 82.42,29.107 82.212,29.107 82.182,29.137 82.182,29.377 82.212,29.407 82.42,29.407 82.45,29.437 82.45,29.677 82.42,29.707 82.212,29.707 82.182,29.737 82.182,29.977 82.212,30.007 82.42,30.007 82.45,30.037 82.45,30.277 82.42,30.307 82.212,30.307 82.182,30.337 82.182,30.577 82.212,30.607 82.42,30.607 82.45,30.637 82.45,30.877 82.42,30.907 82.212,30.907 82.182,30.937 82.182,31.177 82.212,31.207 82.42,31.207 82.45,31.237 82.45,31.477 82.42,31.507 82.212,31.507 82.182,31.537 82.182,31.777 82.212,31.807 82.42,31.807 82.45,31.837 82.45,32.077 82.42,32.107 82.212,32.107 82.182,32.137 82.182,32.377 82.212,32.407 82.42,32.407 82.45,32.437 82.45,32.677 82.42,32.707 82.212,32.707 82.182,32.737 82.182,32.977 82.212,33.007 82.42,33.007 82.45,33.037 82.45,33.277 82.42,33.307 82.212,33.307 82.182,33.337 82.182,33.577 82.212,33.607 82.42,33.607 82.45,33.637 82.45,33.877 82.42,33.907 82.212,33.907 82.182,33.937 82.182,34.177 82.212,34.207 82.42,34.207 82.45,34.237 82.45,34.477 82.42,34.507 82.212,34.507 82.182,34.537 82.182,34.777 82.212,34.807 82.42,34.807 82.45,34.837 82.45,35.077 82.42,35.107 82.212,35.107 82.182,35.137 82.182,35.377 82.212,35.407 82.42,35.407 82.45,35.437 82.45,35.677 82.42,35.707 82.212,35.707 82.182,35.737 82.182,35.977 82.212,36.007 82.42,36.007 82.45,36.037 82.45,36.277 82.42,36.307 82.212,36.307 82.182,36.337 82.182,36.577 82.212,36.607 82.42,36.607 82.45,36.637 82.45,36.877 82.42,36.907 82.212,36.907 82.182,36.937 82.182,37.177 82.212,37.207 82.42,37.207 82.45,37.237 82.45,37.477 82.42,37.507 82.212,37.507 82.182,37.537 82.182,37.777 82.212,37.807 82.42,37.807 82.45,37.837 82.45,38.077 82.42,38.107 82.212,38.107 82.182,38.137 82.182,38.377 82.212,38.407 82.42,38.407 82.45,38.437 82.45,38.677 82.42,38.707 82.212,38.707 82.182,38.737 82.182,38.977 82.212,39.007 82.42,39.007 82.45,39.037 82.45,39.277 82.42,39.307 82.212,39.307 82.182,39.337 82.182,39.577 82.212,39.607 82.42,39.607 82.45,39.637 82.45,39.877 82.42,39.907 82.259,39.907 82.2,39.966 82.2,40.5 82.2,40.741 82.141,40.8 79.5,40.8 U601.N7@79.1,40.4
  L6 (Sig) w0.1: v1(63.5,40.9) 63.9,40.5 63.9,35.2 63.7,35 v1(63.7,23.6)
DDR_A13: U400.H3 U601.T3 | length 63.8
  L1 (Sig) w0.1: v1(65.8,27.6) 66.3,27.6 66.5,27.4 66.795,27.4 66.846,27.4 66.904,27.459 66.904,27.523 66.934,27.553 67.174,27.553 67.204,27.523 67.204,27.393 67.234,27.363 67.474,27.363 67.504,27.393 67.504,27.523 67.534,27.553 67.774,27.553 67.804,27.523 67.804,27.393 67.834,27.363 68.074,27.363 68.104,27.393 68.104,27.523 68.134,27.553 68.374,27.553 68.404,27.523 68.404,27.393 68.434,27.363 68.674,27.363 68.704,27.393 68.704,27.523 68.734,27.553 68.974,27.553 69.004,27.523 69.004,27.393 69.034,27.363 69.274,27.363 69.304,27.393 69.304,27.523 69.334,27.553 69.574,27.553 69.604,27.523 69.604,27.393 69.634,27.363 69.874,27.363 69.904,27.393 69.904,27.523 69.934,27.553 70.174,27.553 70.204,27.523 70.204,27.393 70.234,27.363 70.474,27.363 70.504,27.393 70.504,27.523 70.534,27.553 70.774,27.553 70.804,27.523 70.804,27.393 70.834,27.363 71.074,27.363 71.104,27.393 71.104,27.523 71.134,27.553 71.374,27.553 71.404,27.523 71.404,27.393 71.434,27.363 71.674,27.363 71.704,27.393 71.704,27.523 71.734,27.553 71.974,27.553 72.004,27.523 72.004,27.393 72.034,27.363 72.274,27.363 72.304,27.393 72.304,27.523 72.334,27.553 72.574,27.553 72.604,27.523 72.604,27.393 72.634,27.363 72.874,27.363 72.904,27.393 72.904,27.523 72.934,27.553 73.174,27.553 73.204,27.523 73.204,27.393 73.234,27.363 73.474,27.363 73.504,27.393 73.504,27.523 73.534,27.553 73.774,27.553 73.804,27.523 73.804,27.393 73.834,27.363 74.074,27.363 74.104,27.393 74.104,27.523 74.134,27.553 74.374,27.553 74.404,27.523 74.404,27.393 74.434,27.363 74.674,27.363 74.704,27.393 74.704,27.523 74.734,27.553 74.974,27.553 75.004,27.523 75.004,27.459 75.063,27.4 75.509,27.4 75.8,27.4 75.9,27.5 75.9,27.801 75.9,27.851 75.841,27.91 75.63,27.91 75.6,27.94 75.6,28.18 75.63,28.21 75.881,28.21 75.911,28.24 75.911,28.48 75.881,28.51 75.63,28.51 75.6,28.54 75.6,28.78 75.63,28.81 75.881,28.81 75.911,28.84 75.911,29.08 75.881,29.11 75.63,29.11 75.6,29.14 75.6,29.38 75.63,29.41 75.881,29.41 75.911,29.44 75.911,29.68 75.881,29.71 75.63,29.71 75.6,29.74 75.6,29.98 75.63,30.01 75.881,30.01 75.911,30.04 75.911,30.28 75.881,30.31 75.63,30.31 75.6,30.34 75.6,30.58 75.63,30.61 75.881,30.61 75.911,30.64 75.911,30.88 75.881,30.91 75.63,30.91 75.6,30.94 75.6,31.18 75.63,31.21 75.881,31.21 75.911,31.24 75.911,31.48 75.881,31.51 75.63,31.51 75.6,31.54 75.6,31.78 75.63,31.81 75.881,31.81 75.911,31.84 75.911,32.08 75.881,32.11 75.63,32.11 75.6,32.14 75.6,32.38 75.63,32.41 75.881,32.41 75.911,32.44 75.911,32.68 75.881,32.71 75.815,32.71 75.785,32.74 75.785,32.98 75.815,33.01 75.841,33.01 75.9,33.068 75.9,33.748 U601.T3@75.9,38
  L6 (Sig) w0.1: v1(63.5,43.3) 64.641,43.3 64.8,43.141 64.8,25.659 64.859,25.6 64.967,25.6 65.017,25.6 65.076,25.659 65.076,25.747 65.106,25.777 65.346,25.777 65.376,25.747 65.376,25.456 65.406,25.426 65.646,25.426 65.676,25.456 65.676,25.747 65.706,25.777 65.946,25.777 65.976,25.747 65.976,25.456 66.006,25.426 66.246,25.426 66.276,25.456 66.276,25.747 66.306,25.777 66.546,25.777 66.576,25.747 66.576,25.456 66.606,25.426 66.846,25.426 66.876,25.456 66.876,25.747 66.906,25.777 67.146,25.777 67.176,25.747 67.176,25.456 67.206,25.426 67.446,25.426 67.476,25.456 67.476,25.747 67.506,25.777 67.746,25.777 67.776,25.747 67.776,25.456 67.806,25.426 68.046,25.426 68.076,25.456 68.076,25.747 68.106,25.777 68.346,25.777 68.376,25.747 68.376,25.659 68.434,25.6 68.549,25.6 68.641,25.6 68.7,25.659 68.7,26.541 68.641,26.6 68.4,26.6 68.35,26.6 68.291,26.541 68.291,26.365 68.276,26.35 68.006,26.35 67.991,26.365 67.991,26.835 67.976,26.85 67.706,26.85 67.691,26.835 67.691,26.365 67.676,26.35 67.406,26.35 67.391,26.365 67.391,26.835 67.376,26.85 67.106,26.85 67.091,26.835 67.091,26.365 67.076,26.35 66.806,26.35 66.791,26.365 66.791,26.835 66.776,26.85 66.506,26.85 66.491,26.835 66.491,26.365 66.476,26.35 66.206,26.35 66.191,26.365 66.191,26.541 66.133,26.6 66.064,26.6 65.859,26.6 65.8,26.659 v1(65.8,27.6)
DDR_A14: U400.H4 U601.T7 | length 67.1
  L1 (Sig) w0.1: v1(59.5,25.4) 66.661,25.4 66.711,25.4 66.769,25.459 66.769,25.62 66.799,25.65 67.039,25.65 67.069,25.62 67.069,25.376 67.099,25.346 67.339,25.346 67.369,25.376 67.369,25.62 67.399,25.65 67.639,25.65 67.669,25.62 67.669,25.376 67.699,25.346 67.939,25.346 67.969,25.376 67.969,25.62 67.999,25.65 68.239,25.65 68.269,25.62 68.269,25.376 68.299,25.346 68.539,25.346 68.569,25.376 68.569,25.62 68.599,25.65 68.839,25.65 68.869,25.62 68.869,25.376 68.899,25.346 69.139,25.346 69.169,25.376 69.169,25.62 69.199,25.65 69.439,25.65 69.469,25.62 69.469,25.376 69.499,25.346 69.739,25.346 69.769,25.376 69.769,25.62 69.799,25.65 70.039,25.65 70.069,25.62 70.069,25.376 70.099,25.346 70.339,25.346 70.369,25.376 70.369,25.62 70.399,25.65 70.639,25.65 70.669,25.62 70.669,25.376 70.699,25.346 70.939,25.346 70.969,25.376 70.969,25.62 70.999,25.65 71.239,25.65 71.269,25.62 71.269,25.376 71.299,25.346 71.539,25.346 71.569,25.376 71.569,25.62 71.599,25.65 71.839,25.65 71.869,25.62 71.869,25.376 71.899,25.346 72.139,25.346 72.169,25.376 72.169,25.62 72.199,25.65 72.439,25.65 72.469,25.62 72.469,25.376 72.499,25.346 72.739,25.346 72.769,25.376 72.769,25.62 72.799,25.65 73.039,25.65 73.069,25.62 73.069,25.376 73.099,25.346 73.339,25.346 73.369,25.376 73.369,25.62 73.399,25.65 73.639,25.65 73.669,25.62 73.669,25.376 73.699,25.346 73.939,25.346 73.969,25.376 73.969,25.62 73.999,25.65 74.239,25.65 74.269,25.62 74.269,25.376 74.299,25.346 74.539,25.346 74.569,25.376 74.569,25.62 74.599,25.65 74.839,25.65 74.869,25.62 74.869,25.376 74.899,25.346 75.139,25.346 75.169,25.376 75.169,25.62 75.199,25.65 75.439,25.65 75.469,25.62 75.469,25.376 75.499,25.346 75.739,25.346 75.769,25.376 75.769,25.476 75.799,25.506 76.039,25.506 76.069,25.476 76.069,25.459 76.128,25.4 77.406,25.4 78,25.4 78.2,25.6 78.2,25.8 78.2,25.85 78.141,25.909 77.681,25.909 77.651,25.939 77.651,26.179 77.681,26.209 78.42,26.209 78.45,26.239 78.45,26.479 78.42,26.509 77.681,26.509 77.651,26.539 77.651,26.779 77.681,26.809 78.42,26.809 78.45,26.839 78.45,27.079 78.42,27.109 77.681,27.109 77.651,27.139 77.651,27.379 77.681,27.409 78.42,27.409 78.45,27.439 78.45,27.679 78.42,27.709 77.681,27.709 77.651,27.739 77.651,27.979 77.681,28.009 78.42,28.009 78.45,28.039 78.45,28.279 78.42,28.309 77.681,28.309 77.651,28.339 77.651,28.579 77.681,28.609 78.141,28.609 78.2,28.667 78.2,29 78.2,29.2 78.3,29.3 78.6,29.3 79.1,29.8 U601.T7@79.1,38
  L6 (Sig) w0.1: v1(59.5,25.4) 59.5,39.3 59.9,39.7 59.9,40.441 59.959,40.5 61.441,40.5 61.5,40.559 61.5,41.3 61.6,41.4 62.7,42.5 v1(62.7,43.3)
DDR_A15: U400.D3 U601.M7 | length 67.7
  L1 (Sig) w0.1: v1(63.2,23) 82.7,23 82.9,23.2 82.9,30.901 82.9,31.251 82.959,31.31 83.112,31.31 83.142,31.34 83.142,31.58 83.112,31.61 82.888,31.61 82.858,31.64 82.858,31.88 82.888,31.91 83.112,31.91 83.142,31.94 83.142,32.18 83.112,32.21 82.888,32.21 82.858,32.24 82.858,32.48 82.888,32.51 83.112,32.51 83.142,32.54 83.142,32.78 83.112,32.81 82.888,32.81 82.858,32.84 82.858,33.08 82.888,33.11 83.112,33.11 83.142,33.14 83.142,33.38 83.112,33.41 82.888,33.41 82.858,33.44 82.858,33.68 82.888,33.71 83.112,33.71 83.142,33.74 83.142,33.98 83.112,34.01 82.888,34.01 82.858,34.04 82.858,34.28 82.888,34.31 83.112,34.31 83.142,34.34 83.142,34.58 83.112,34.61 82.888,34.61 82.858,34.64 82.858,34.88 82.888,34.91 83.112,34.91 83.142,34.94 83.142,35.18 83.112,35.21 82.888,35.21 82.858,35.24 82.858,35.48 82.888,35.51 83.112,35.51 83.142,35.54 83.142,35.78 83.112,35.81 82.888,35.81 82.858,35.84 82.858,36.08 82.888,36.11 83.112,36.11 83.142,36.14 83.142,36.38 83.112,36.41 82.888,36.41 82.858,36.44 82.858,36.68 82.888,36.71 83.112,36.71 83.142,36.74 83.142,36.98 83.112,37.01 82.888,37.01 82.858,37.04 82.858,37.28 82.888,37.31 83.112,37.31 83.142,37.34 83.142,37.58 83.112,37.61 82.888,37.61 82.858,37.64 82.858,37.88 82.888,37.91 83.112,37.91 83.142,37.94 83.142,38.18 83.112,38.21 82.888,38.21 82.858,38.24 82.858,38.48 82.888,38.51 83.112,38.51 83.142,38.54 83.142,38.78 83.112,38.81 82.888,38.81 82.858,38.84 82.858,39.08 82.888,39.11 83.112,39.11 83.142,39.14 83.142,39.38 83.112,39.41 82.888,39.41 82.858,39.44 82.858,39.68 82.888,39.71 83.112,39.71 83.142,39.74 83.142,39.98 83.112,40.01 82.888,40.01 82.858,40.04 82.858,40.28 82.888,40.31 83.112,40.31 83.142,40.34 83.142,40.58 83.112,40.61 82.888,40.61 82.858,40.64 82.858,40.88 82.888,40.91 83.112,40.91 83.142,40.94 83.142,41.18 83.112,41.21 82.959,41.21 82.9,41.268 82.9,41.47 82.9,41.541 82.841,41.6 79.5,41.6 U601.M7@79.1,41.2
  L6 (Sig) w0.1: v1(63.2,23) 63.2,35.1 63.5,35.4 v1(63.5,40.1)
DDR_BA0: U400.C4 U601.M2 | length 69.8
  L1 (Sig) w0.1: U400.C4@62.7,39.3 62.3,38.9 61.559,38.9 61.5,38.841 61.5,36.759 61.559,36.7 62.641,36.7 62.7,36.641 62.7,35.559 62.759,35.5 64.419,35.5 64.478,35.441 64.478,35.106 64.478,34.861 64.419,34.803 63.645,34.803 63.615,34.773 63.615,34.533 63.645,34.503 64.489,34.503 64.519,34.473 64.519,34.233 64.489,34.203 62.997,34.203 62.967,34.173 62.967,33.933 62.997,33.903 64.489,33.903 64.519,33.873 64.519,33.633 64.489,33.603 62.997,33.603 62.967,33.573 62.967,33.333 62.997,33.303 64.489,33.303 64.519,33.273 64.519,33.033 64.489,33.003 62.997,33.003 62.967,32.973 62.967,32.733 62.997,32.703 64.489,32.703 64.519,32.673 64.519,32.433 64.489,32.403 62.997,32.403 62.967,32.373 62.967,32.133 62.997,32.103 64.489,32.103 64.519,32.073 64.519,31.833 64.489,31.803 62.997,31.803 62.967,31.773 62.967,31.533 62.997,31.503 64.489,31.503 64.519,31.473 64.519,31.233 64.489,31.203 62.997,31.203 62.967,31.173 62.967,30.933 62.997,30.903 64.489,30.903 64.519,30.873 64.519,30.633 64.489,30.603 62.997,30.603 62.967,30.573 62.967,30.333 62.997,30.303 64.489,30.303 64.519,30.273 64.519,30.033 64.489,30.003 62.997,30.003 62.967,29.973 62.967,29.733 62.997,29.703 64.489,29.703 64.519,29.673 64.519,29.433 64.489,29.403 62.997,29.403 62.967,29.373 62.967,29.133 62.997,29.103 64.489,29.103 64.519,29.073 64.519,28.833 64.489,28.803 62.997,28.803 62.967,28.773 62.967,28.533 62.997,28.503 64.419,28.503 64.478,28.444 64.478,28.394 64.478,28.259 64.536,28.2 v1(65.4,28.2) ; v1(73.2,28.7) 73.2,40.1 73.9,40.8 74.7,40.8 U601.M2@75.1,41.2
  L6 (Sig) w0.1: v1(65.4,28.2) 65.4,28.7 65.5,28.8 73.032,28.8 73.132,28.7 v1(73.2,28.7)
DDR_BA1: U400.E1 U601.N8 | length 63.4
  L1 (Sig) w0.1: U400.E1@65.1,40.9 69.441,40.9 69.6,40.741 69.6,40.5 69.6,40.15 69.541,40.091 69.38,40.091 69.35,40.061 69.35,39.821 69.38,39.791 69.583,39.791 69.613,39.761 69.613,39.521 69.583,39.491 69.38,39.491 69.35,39.461 69.35,39.221 69.38,39.191 69.583,39.191 69.613,39.161 69.613,38.921 69.583,38.891 69.38,38.891 69.35,38.861 69.35,38.621 69.38,38.591 69.583,38.591 69.613,38.561 69.613,38.321 69.583,38.291 69.38,38.291 69.35,38.261 69.35,38.021 69.38,37.991 69.583,37.991 69.613,37.961 69.613,37.721 69.583,37.691 69.38,37.691 69.35,37.661 69.35,37.421 69.38,37.391 69.583,37.391 69.613,37.361 69.613,37.121 69.583,37.091 69.38,37.091 69.35,37.061 69.35,36.821 69.38,36.791 69.583,36.791 69.613,36.761 69.613,36.521 69.583,36.491 69.38,36.491 69.35,36.461 69.35,36.221 69.38,36.191 69.583,36.191 69.613,36.161 69.613,35.921 69.583,35.891 69.38,35.891 69.35,35.861 69.35,35.621 69.38,35.591 69.583,35.591 69.613,35.561 69.613,35.321 69.583,35.291 69.38,35.291 69.35,35.261 69.35,35.021 69.38,34.991 69.583,34.991 69.613,34.961 69.613,34.721 69.583,34.691 69.38,34.691 69.35,34.661 69.35,34.421 69.38,34.391 69.583,34.391 69.613,34.361 69.613,34.121 69.583,34.091 69.38,34.091 69.35,34.061 69.35,33.821 69.38,33.791 69.541,33.791 69.6,33.733 69.6,33.494 69.6,32.6 69.4,32.4 v1(68.4,32.4) ; U601.N8@79.9,40.4 80.3,40 81.541,40 81.7,39.841 v1(81.7,32)
  L6 (Sig) w0.1: v1(68.4,32.4) 80.051,32.4 80.138,32.4 80.2,32.338 80.2,31.628 80.2,31.578 80.259,31.519 80.42,31.519 80.45,31.489 80.45,31.249 80.42,31.219 80.043,31.219 80.013,31.189 80.013,30.949 80.043,30.919 80.42,30.919 80.45,30.889 80.45,30.649 80.42,30.619 80.043,30.619 80.013,30.589 80.013,30.349 80.043,30.319 80.42,30.319 80.45,30.289 80.45,30.049 80.42,30.019 80.043,30.019 80.013,29.989 80.013,29.749 80.043,29.719 80.42,29.719 80.45,29.689 80.45,29.449 80.42,29.419 80.043,29.419 80.013,29.389 80.013,29.149 80.043,29.119 80.42,29.119 80.45,29.089 80.45,28.849 80.42,28.819 80.043,28.819 80.013,28.789 80.013,28.549 80.043,28.519 80.42,28.519 80.45,28.489 80.45,28.249 80.42,28.219 80.043,28.219 80.013,28.189 80.013,27.949 80.043,27.919 80.42,27.919 80.45,27.889 80.45,27.649 80.42,27.619 80.043,27.619 80.013,27.589 80.013,27.349 80.043,27.319 80.141,27.319 80.2,27.261 80.2,27.149 80.2,26.864 80.259,26.806 81.641,26.806 81.7,26.864 81.7,27.905 81.7,28.133 81.759,28.191 81.92,28.191 81.95,28.221 81.95,28.461 81.92,28.491 81.48,28.491 81.45,28.521 81.45,28.761 81.48,28.791 81.92,28.791 81.95,28.821 81.95,29.061 81.92,29.091 81.48,29.091 81.45,29.121 81.45,29.361 81.48,29.391 81.92,29.391 81.95,29.421 81.95,29.661 81.92,29.691 81.48,29.691 81.45,29.721 81.45,29.961 81.48,29.991 81.92,29.991 81.95,30.021 81.95,30.261 81.92,30.291 81.48,30.291 81.45,30.321 81.45,30.561 81.48,30.591 81.92,30.591 81.95,30.621 81.95,30.861 81.92,30.891 81.48,30.891 81.45,30.921 81.45,31.161 81.48,31.191 81.92,31.191 81.95,31.221 81.95,31.461 81.92,31.491 81.759,31.491 81.7,31.55 81.7,31.6 v1(81.7,32)
DDR_BA2: U400.B3 U601.M3 | length 63.6
  L1 (Sig) w0.1: U400.B3@63.5,38.5 63.9,38.1 63.9,37.2 64.2,36.9 65.7,36.9 65.9,36.7 65.9,34.7 65.9,34.65 65.959,34.591 66.174,34.591 66.204,34.561 66.204,34.321 66.174,34.291 65.92,34.291 65.89,34.261 65.89,34.021 65.92,33.991 66.174,33.991 66.204,33.961 66.204,33.721 66.174,33.691 65.92,33.691 65.89,33.661 65.89,33.421 65.92,33.391 66.174,33.391 66.204,33.361 66.204,33.121 66.174,33.091 65.92,33.091 65.89,33.061 65.89,32.821 65.92,32.791 66.174,32.791 66.204,32.761 66.204,32.521 66.174,32.491 65.92,32.491 65.89,32.461 65.89,32.221 65.92,32.191 66.174,32.191 66.204,32.161 66.204,31.921 66.174,31.891 65.92,31.891 65.89,31.861 65.89,31.621 65.92,31.591 66.174,31.591 66.204,31.561 66.204,31.321 66.174,31.291 65.92,31.291 65.89,31.261 65.89,31.021 65.92,30.991 66.174,30.991 66.204,30.961 66.204,30.721 66.174,30.691 65.92,30.691 65.89,30.661 65.89,30.421 65.92,30.391 66.174,30.391 66.204,30.361 66.204,30.121 66.174,30.091 65.959,30.091 65.9,30.033 65.9,29.594 65.9,29.377 65.959,29.318 66.182,29.318 v1(66.2,29.3) ; U601.M3@75.9,41.2 77.4,41.2 77.5,41.1 v1(77.5,29.3)
  L6 (Sig) w0.1: v1(66.2,29.3) 66.713,29.3 66.763,29.3 66.821,29.359 66.821,29.606 66.851,29.636 67.091,29.636 67.121,29.606 67.121,29.195 67.151,29.165 67.391,29.165 67.421,29.195 67.421,29.606 67.451,29.636 67.691,29.636 67.721,29.606 67.721,29.195 67.751,29.165 67.991,29.165 68.021,29.195 68.021,29.606 68.051,29.636 68.291,29.636 68.321,29.606 68.321,29.195 68.351,29.165 68.591,29.165 68.621,29.195 68.621,29.606 68.651,29.636 68.891,29.636 68.921,29.606 68.921,29.195 68.951,29.165 69.191,29.165 69.221,29.195 69.221,29.606 69.251,29.636 69.491,29.636 69.521,29.606 69.521,29.195 69.551,29.165 69.791,29.165 69.821,29.195 69.821,29.606 69.851,29.636 70.091,29.636 70.121,29.606 70.121,29.195 70.151,29.165 70.391,29.165 70.421,29.195 70.421,29.606 70.451,29.636 70.691,29.636 70.721,29.606 70.721,29.195 70.751,29.165 70.991,29.165 71.021,29.195 71.021,29.606 71.051,29.636 71.291,29.636 71.321,29.606 71.321,29.195 71.351,29.165 71.591,29.165 71.621,29.195 71.621,29.241 71.68,29.3 71.889,29.3 74.101,29.3 74.451,29.3 74.51,29.241 74.51,27.276 74.54,27.246 74.78,27.246 74.81,27.276 74.81,29.284 74.84,29.314 75.08,29.314 75.11,29.284 75.11,27.276 75.14,27.246 75.38,27.246 75.41,27.276 75.41,29.284 75.44,29.314 75.68,29.314 75.71,29.284 75.71,27.276 75.74,27.246 75.98,27.246 76.01,27.276 76.01,29.284 76.04,29.314 76.28,29.314 76.31,29.284 76.31,27.276 76.34,27.246 76.58,27.246 76.61,27.276 76.61,29.241 76.669,29.3 v1(77.5,29.3)
DDR_CK_N: U400.D1 U601.K7 | length 61.3
  L1 (Sig) w0.1: U400.D1@65.1,40.1 68.066,40.1 68.3,39.866 68.3,34.378 68.15,34.228 68.15,33.484 68.3,33.334 v1(68.3,33.3) ; U601.K7@79.1,42.8 79.5,43.2 81.193,43.2 81.431,43.438 83.718,43.438 83.832,43.323 v1(83.9,43.323)
  L6 (Sig) w0.1: v1(68.3,33.3) 68.348,33.252 68.479,33.252 68.484,33.248 74.028,33.248 74.078,33.248 74.137,33.307 74.137,33.401 74.152,33.416 74.422,33.416 74.437,33.401 74.437,33.25 74.452,33.235 74.722,33.235 74.737,33.25 74.737,33.401 74.752,33.416 75.022,33.416 75.037,33.401 75.037,33.25 75.052,33.235 75.322,33.235 75.337,33.25 75.337,33.401 75.352,33.416 75.622,33.416 75.637,33.401 75.637,33.25 75.652,33.235 75.922,33.235 75.937,33.25 75.937,33.401 75.952,33.416 76.222,33.416 76.237,33.401 76.237,33.25 76.252,33.235 76.522,33.235 76.537,33.25 76.537,33.401 76.552,33.416 76.822,33.416 76.837,33.401 76.837,33.307 76.896,33.248 76.997,33.248 81.676,33.248 82.224,32.7 82.523,32.7 82.573,32.7 82.631,32.759 82.631,32.989 82.646,33.004 82.916,33.004 82.931,32.989 82.931,32.687 82.946,32.672 83.216,32.672 83.231,32.687 83.231,32.989 83.246,33.004 83.516,33.004 83.531,32.989 83.531,32.687 83.546,32.672 83.816,32.672 83.831,32.687 83.831,32.989 83.846,33.004 84.116,33.004 84.131,32.989 84.131,32.759 84.19,32.7 84.4,32.7 84.599,32.899 84.599,33.024 84.6,33.025 84.6,33.094 ; v1(83.9,43.323) 83.968,43.323 84.145,43.5 84.541,43.5 84.6,43.441 84.6,42.944 84.6,42.682 84.834,42.447 85.424,42.447 85.439,42.432 85.439,42.162 85.424,42.147 84.541,42.147 84.35,41.957 84.35,41.438 84.541,41.247 85.424,41.247 85.439,41.232 85.439,40.962 85.424,40.947 84.541,40.947 84.35,40.757 84.35,40.238 84.541,40.047 85.424,40.047 85.439,40.032 85.439,39.762 85.424,39.747 84.541,39.747 84.35,39.557 84.35,39.038 84.541,38.847 85.424,38.847 85.439,38.832 85.439,38.562 85.424,38.547 84.541,38.547 84.35,38.357 84.35,37.838 84.541,37.647 85.424,37.647 85.439,37.632 85.439,37.362 85.424,37.347 84.541,37.347 84.35,37.157 84.35,36.638 84.541,36.447 85.424,36.447 85.439,36.432 85.439,36.162 85.424,36.147 84.541,36.147 84.35,35.957 84.35,35.438 84.541,35.247 85.424,35.247 85.439,35.232 85.439,34.962 85.424,34.947 84.541,34.947 84.35,34.757 84.35,34.238 84.541,34.047 85.4,34.047 85.415,34.032 85.415,33.762 85.4,33.747 84.834,33.747 84.6,33.513 84.6,33.1